# EAGLE board Generic MOSFET LVD, 3 pos (EAGLE 7.2.0)
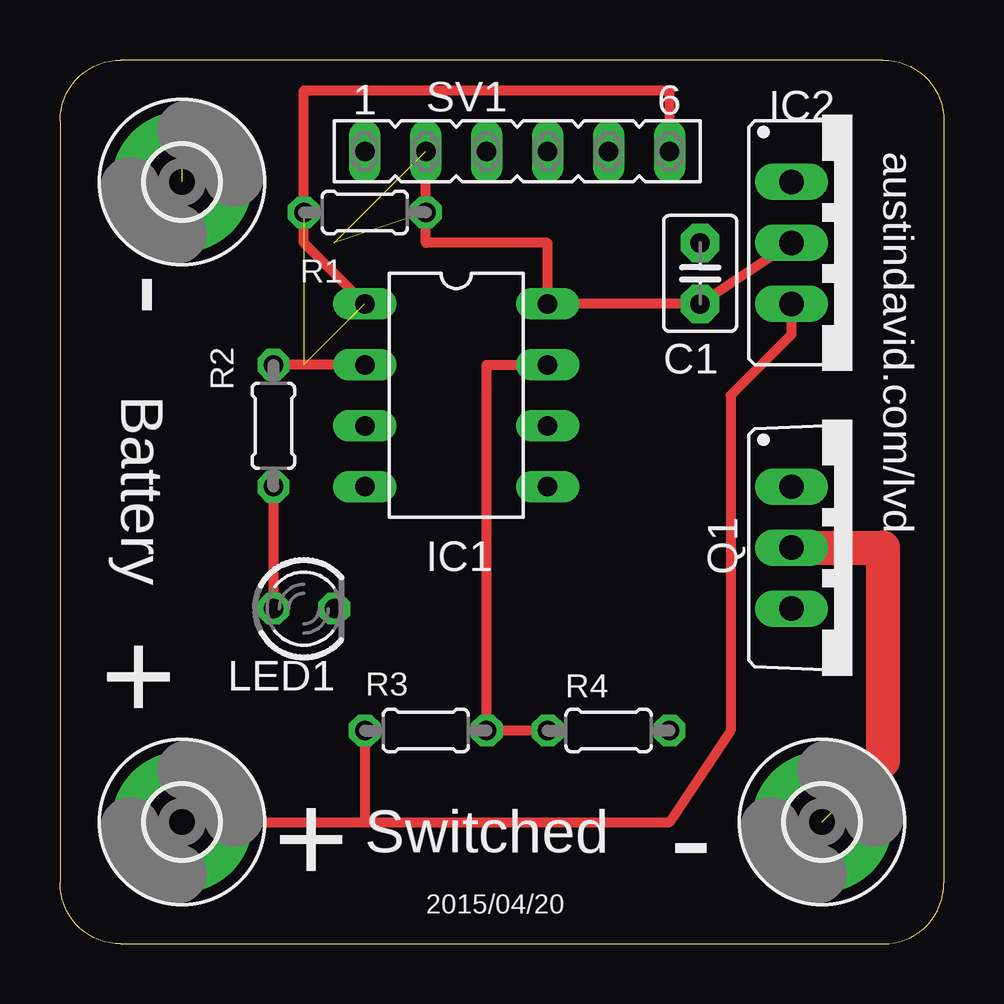
[diagram p0: board, top side]
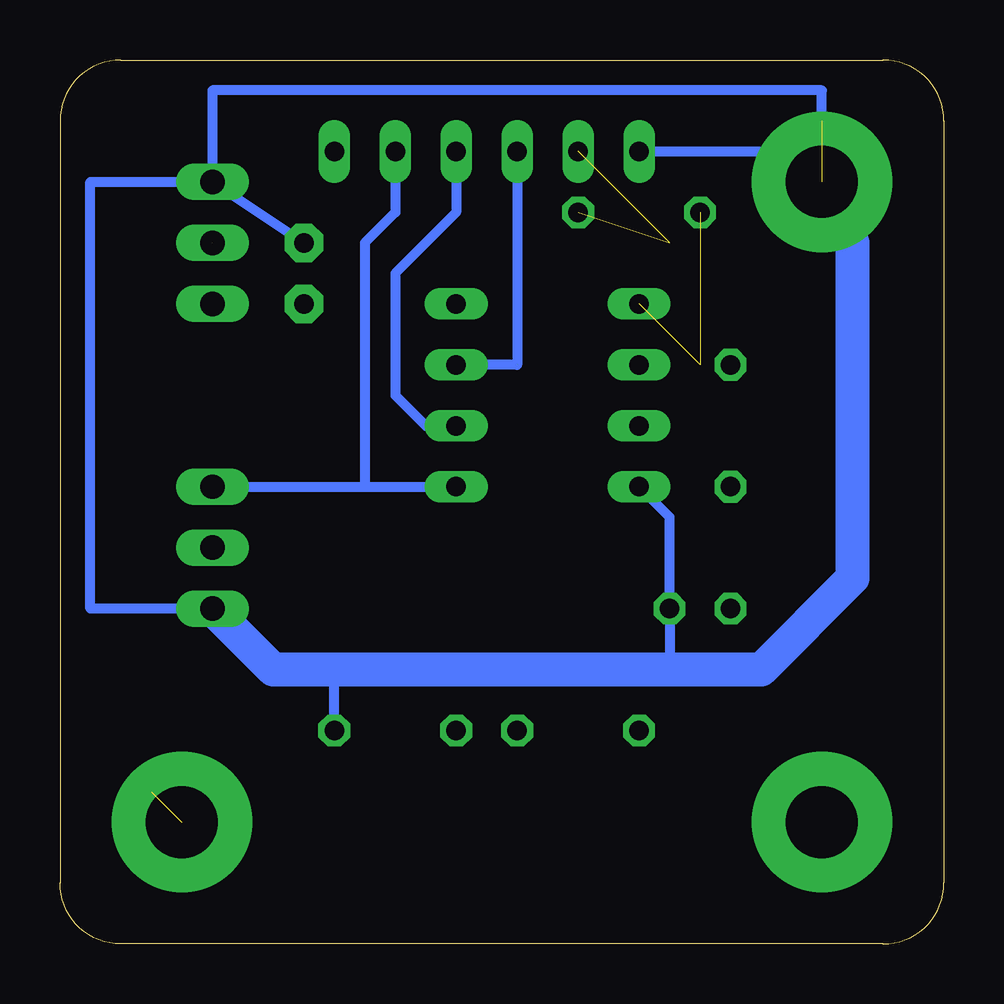
[diagram p1: board, bottom side, seen from below]

Size 36.83 x 36.83 mm. Coordinates in mm from the lower left corner, seen from the top.
Outline: 34.29,36.82 34.29,36.83
Outline: 34.29,36.83 2.54,36.83
Outline: 2.54,36.83 2.54,36.82
Outline: 34.29,36.83 arc-90 36.83,34.29 36.83,2.54 arc-90 34.29,0 2.54,0 arc-90 0,2.54 0,34.29 arc-90 2.54,36.83
Copper layers (1*16): Top 0.035mm / dielectric 1.5mm / Bottom 0.035mm
Design rules "default": minimum track width 10mil, minimum drill 24mil, track to track 8mil, track to pad 8mil, pad to pad 8mil, via to via 8mil, smd to smd 8mil, copper to edge 40mil, drill to drill 8mil, minimum pad ring 10mil, minimum via ring 8mil, stop-mask expansion 4mil, vias tented up to drill 0mil, thermal gap 10mil

## Footprints (pad centres in the part's own frame; a part is rotated, then mirrored left to right if it is on the bottom)
C2.5-3 = drill 0.813 pad 1.6 octagon: 1 -1.27,0; 2 1.27,0
3,0-PAD = drill 3 pad 5.842: B3,0 0,0
DIL08 = drill 0.813 long: 1 -3.81,-3.81; 2 -1.27,-3.81; 3 1.27,-3.81; 4 3.81,-3.81; 5 3.81,3.81; 6 1.27,3.81; 7 -1.27,3.81; 8 -3.81,3.81
78XXS = drill 1.016 long: GND 0,-2.54; IN -2.54,-2.54; OUT 2.54,-2.54
LED3MM = drill 0.813 octagon: A -1.27,0; K 1.27,0
TO220BV = drill 1.016 long: D 0,-2.54; G -2.54,-2.54; S 2.54,-2.54
0204/5 = drill 0.813 octagon: 1 -2.54,0; 2 2.54,0
FE06 = drill 0.813 long: 1 -6.35,0; 2 -3.81,0; 3 -1.27,0; 4 1.27,0; 5 3.81,0; 6 6.35,0

## Placement (x,y rotation side)
C1  0.1uF  [C2.5-3]  26.67,27.94 90 top
GND_BATT  MOUNT-PAD-ROUND3.0  [3,0-PAD]  5.08,31.75 0 top
GND_SWITCHED  MOUNT-PAD-ROUND3.0  [3,0-PAD]  31.75,5.08 0 top
IC1  ATTINY85  [DIL08]  16.51,22.86 270 top
IC2  [78XXS]  33.02,29.21 270 top
LED1  TLLR4400  [LED3MM]  10.16,13.97 0 top
Q1  IRF520  [TO220BV]  33.02,16.51 270 top
R1  10k  [0204/5]  12.7,30.48 180 top
R2  470  [0204/5]  8.89,21.59 270 top
R3  33k  [0204/5]  15.24,8.89 0 top
R4  10k  [0204/5]  22.86,8.89 180 top
SV1  [FE06]  19.05,33.02 0 top
V_BATT  MOUNT-PAD-ROUND3.0  [3,0-PAD]  5.08,5.08 0 top

## Library data of the parts
C1 = capacitor-wima
GND_BATT GND_SWITCHED V_BATT = holes
IC1 = atmel; MPN: ATTINY13-20PU; OC_FARNELL: 9171550; OC_NEWARK: 96K6521
IC2 = v-reg
LED1 = led; MF: VISHAY SEMICONDUCTOR; OC_FARNELL: 1612437
Q1 = transistor-power
R1-R4 = resistor
SV1 = con-lsta; OC_FARNELL: unknown; OC_NEWARK: unknown

## Nets
GND: C1.2 GND_BATT.B3,0 IC1.4 IC2.IN LED1.K Q1.S R4.1 SV1.1
GND_SWITCHED: GND_SWITCHED.B3,0 Q1.D
LED_SIGNAL: IC1.2 R2.1
N$1: IC1.1 R1.2 SV1.6
N$4: LED1.A R2.2
N$5: IC1.5 Q1.G SV1.5
N$6: IC1.6 SV1.4
V_BATT: IC2.OUT R3.1 V_BATT.B3,0
V_SENSE: IC1.7 R3.2 R4.2 SV1.3
VCC: C1.1 IC1.8 IC2.GND R1.1 SV1.2

## Tracks (layer width: path | path; a pad name or v marks a point on that pad's centre or on a via)
GND  (2 unrouted)
  Bottom 0.406: IC2.IN C1.2 | Q1.S 35.56,13.97 35.56,31.75 IC2.IN | SV1.1 5.08,33.02 | 5.08,34.29 5.08,35.56 30.48,35.56 IC2.IN | R4.1 25.4,11.43 | IC1.4 11.43,17.78 LED1.K 11.43,11.43
  Bottom 1.422: 3.81,29.21 3.81,15.24 7.62,11.43 11.43,11.43 25.4,11.43 27.94,11.43 Q1.S
GND_SWITCHED  (1 unrouted)
  Top 1.422: Q1.D 34.29,16.51 34.29,7.62 33.02,6.35
LED_SIGNAL
  Top 0.406: IC1.2 R2.1
N$1  (2 unrouted)
  Top 0.406: IC1.1 10.16,29.21 10.16,35.56 25.4,35.56 SV1.6
N$4
  Top 0.406: R2.2 LED1.A
N$5
  Bottom 0.406: SV1.5 22.86,30.48 24.13,29.21 24.13,19.05 | 24.13,19.05 IC1.5 | Q1.G 24.13,19.05
N$6
  Bottom 0.406: SV1.4 20.32,30.48 22.86,27.94 22.86,22.86 21.59,21.59 IC1.6
V_BATT
  Top 0.406: V_BATT.B3,0 12.7,5.08 | IC2.OUT 30.48,25.4 27.94,22.86 27.94,8.89 25.4,5.08 12.7,5.08 | R3.1 12.7,5.08
V_SENSE  (1 unrouted)
  Top 0.406: R4.2 R3.2 17.78,24.13 19.05,24.13
  Bottom 0.406: SV1.3 17.78,24.13 IC1.7
VCC  (3 unrouted)
  Top 0.406: SV1.2 15.24,29.21 20.32,29.21 IC1.8 C1.1 IC2.GND

## Text on the board
tNames: austindavid.com/lvd | - | Battery | + | Switched | + | - | 2015/04/20